# EAGLE board LEDDriver_v_4 (EAGLE 6.4)
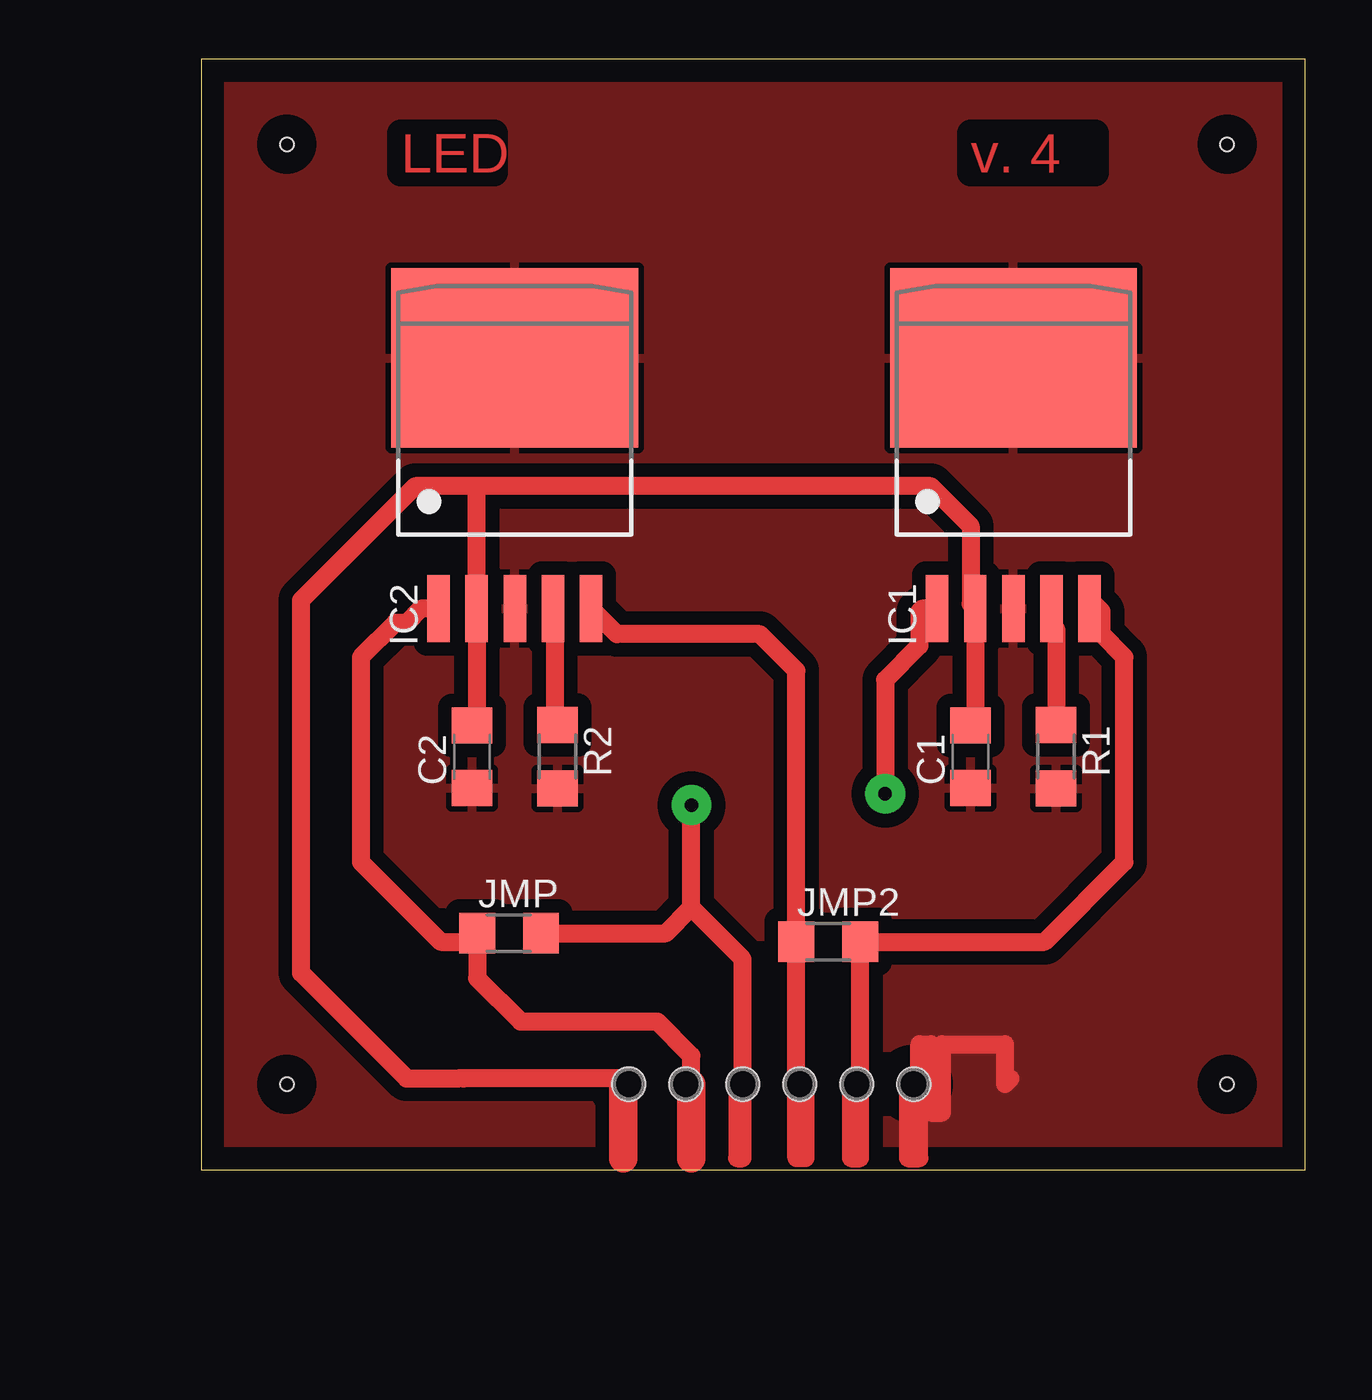
[diagram p0: board, top side]
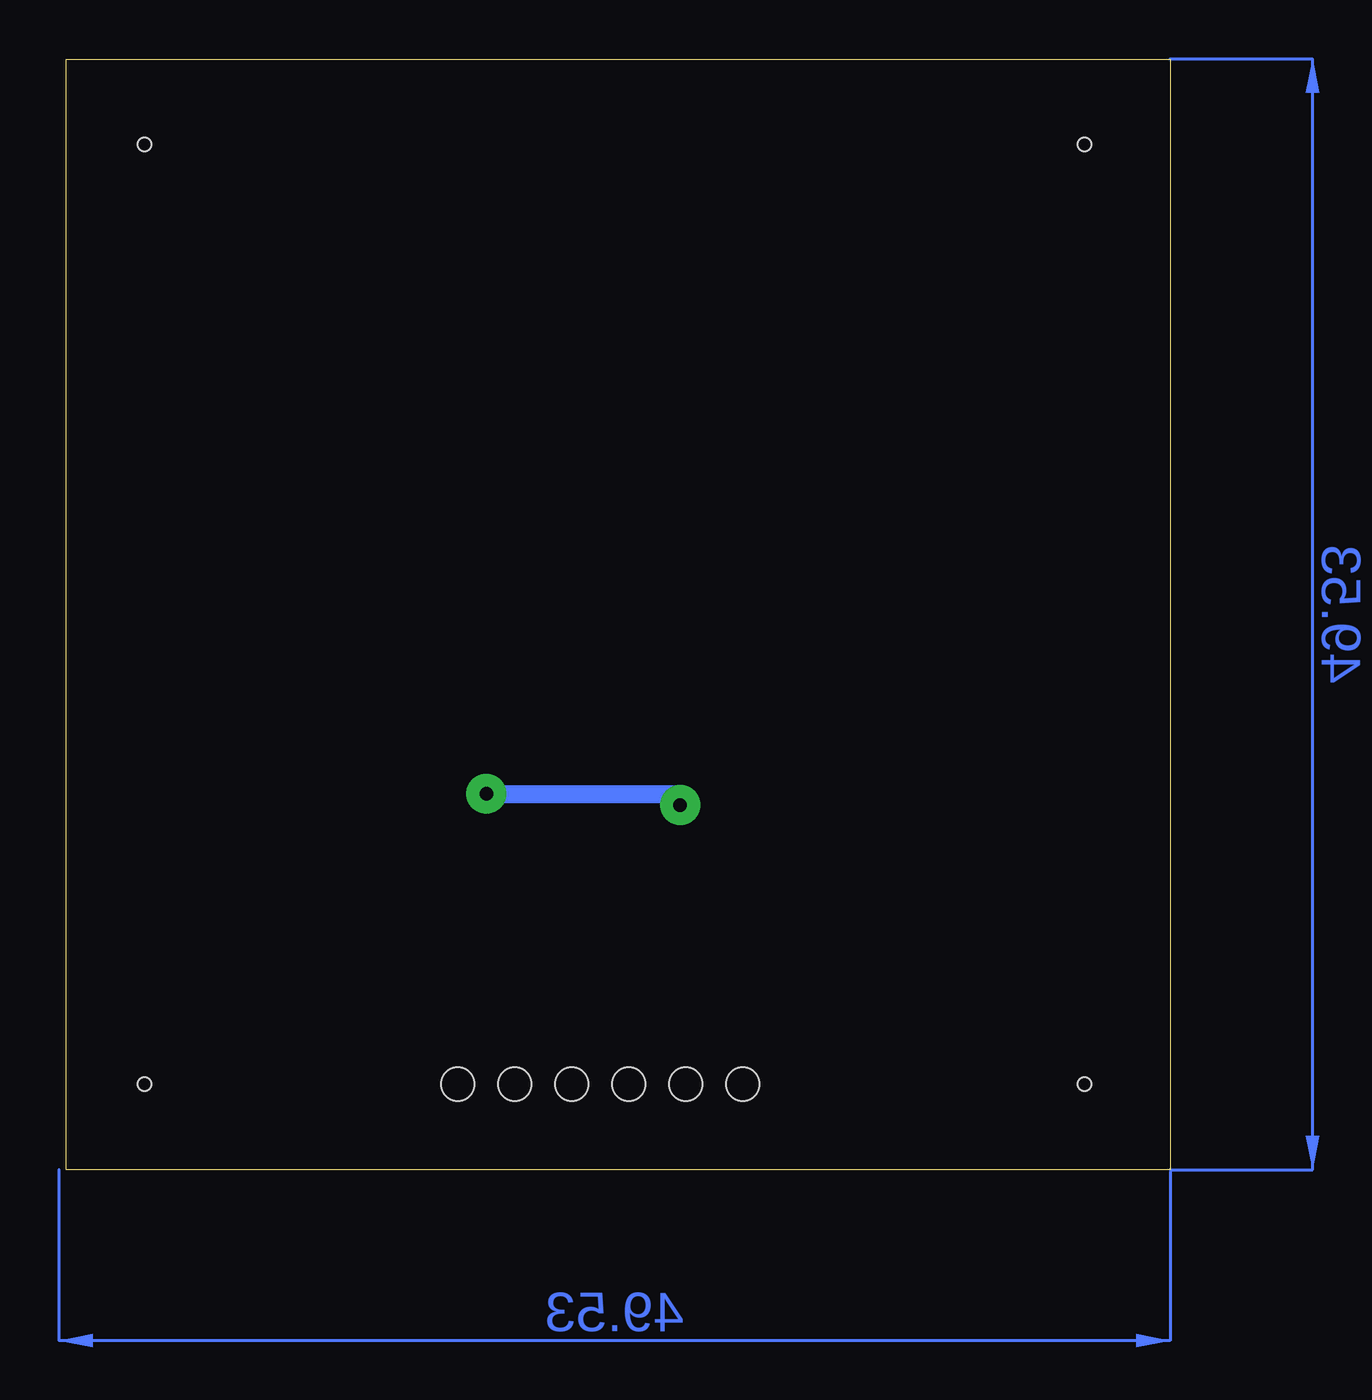
[diagram p1: board, bottom side, seen from below]

Size 49.2 x 49.52 mm. Coordinates in mm from the lower left corner, seen from the top.
Outline: 0,0 49.2,0 49.2,49.52 0,49.52 0,0
Copper layers (1*16): Top 0.035mm / dielectric 1.5mm / Bottom 0.035mm
Design rules "default *": minimum track width 10mil, minimum drill 24mil, track to track 15mil, track to pad 15mil, pad to pad 15mil, via to via 15mil, smd to smd 15mil, copper to edge 40mil, drill to drill 10mil, minimum pad ring 10mil, minimum via ring 8mil, stop-mask expansion 4mil, vias tented up to drill 0mil, thermal gap 10mil
Holes 0.6 mm at 45.72,3.81 45.72,45.72 3.81,45.72 3.81,3.81

## Footprints (pad centres in the part's own frame; a part is rotated, then mirrored left to right if it is on the bottom)
C1206 = smd 1.6 x 1.8: 1 -1.4,0; 2 1.4,0
TO263_5 = smd 1 x 3: 1 -3.4,-8; 2 -1.7,-8; 3 0,-8; 4 1.7,-8; 5 3.4,-8 | smd 11 x 8: TAB 0,3.175
R1206 = smd 1.6 x 1.803: 1 -1.422,0; 2 1.422,0
1X06_HOLES_ONLY = drill 0.889 pad 0.813: 1 0,0; 2 2.54,0; 3 5.08,0; 4 7.62,0; 5 10.16,0; 6 12.7,0 | hole 1.473: 0,0; 2.54,0; 5.08,0; 7.62,0; 10.16,0; 12.7,0

## Placement (x,y rotation side)
C1  [C1206]  34.29,18.41 90 top
C2  [C1206]  12.06,18.41 90 top
IC1  CAT4101  [TO263_5]  36.2,33.02 0 top
IC2  CAT4101  [TO263_5]  13.97,33.02 0 top
JMP  CH  [R1206]  13.72,10.54 0 top
JMP2  AMP  [R1206]  27.94,10.16 0 top
JP1  [1X06_HOLES_ONLY]  31.75,3.81 180 top
R1  [R1206]  38.1,18.41 270 top
R2  [R1206]  15.88,18.41 270 top

## Library data of the parts
C1 C2 JMP JMP2 R1 R2 = adafruit
IC1 IC2 = on-semiconductor; MPN: CAT4101TV-T75; OC_FARNELL: 1718452; OC_NEWARK: 08R5264
JP1 = SparkFun-Connectors

## Nets
+5V: C1.2 C2.2 IC1.2 IC2.2 JP1.6
GND: C1.1 C2.1 IC1.3 IC1.TAB IC2.3 IC2.TAB JP1.1 R1.2 R2.2
N$1: IC1.1 JMP.2 JP1.4
N$2: IC2.1 JMP.1 JP1.5
N$3: IC1.4 R1.1
N$4: IC2.5 JMP2.1 JP1.3
N$5: IC1.5 JMP2.2 JP1.2
N$8: IC2.4 R2.1

## Tracks (layer width: path | path; a pad name or v marks a point on that pad's centre or on a via)
+5V
  Top 0.813: C1.2 34.49,20.02 IC1.2 34.29,25.23 34.29,28.7 32.51,30.48 12.19,30.48 | C2.2 12.27,20.02 IC2.2 12.27,30.4 12.19,30.48 | 12.19,30.48 9.53,30.48 4.45,25.4 4.45,8.76 9.14,4.06 11.43,4.06 11.68,4.06 18.8,4.06 18.8,3.81 JP1.6
  Top 1.27: 18.8,3.81 18.8,0.51
GND
  Top 0.813: 36.07,4.06 35.81,3.81 35.81,5.59 33.02,5.59 33.02,2.54 32.51,2.54 32.51,5.59 32,5.59 32,0.51 31.5,0.51 31.5,3.81 JP1.1
  pour Top (isolate 0.61): 0,49.53 49.53,49.53 49.53,0 0,0
N$1  (via drill 0.6 pad 1.78)
  Top 0.813: 21.84,11.68 24.13,9.4 24.13,0.51 23.88,0.51 23.88,3.81 JP1.4 | 21.84,11.68 v21.84,16.26 21.84,16.76 | IC1.1 32.13,25.02 32,24.89 32,23.37 30.48,21.84 v30.48,16.76 | JMP.2 20.7,10.54 21.84,11.68
  Bottom 0.813: v30.48,16.76 21.84,16.76 v21.84,16.26
N$2
  Top 0.813: IC2.1 9.78,25.02 9.14,24.38 8.64,24.38 7.11,22.86 7.11,13.72 10.67,10.16 11.91,10.16 JMP.1 12.29,8.53 14.22,6.6 20.32,6.6 21.84,5.08 21.84,3.81 JP1.5
  Top 1.27: 21.84,3.81 21.84,0.51
N$3
  Top 0.254: 38.1,24.13 IC1.4
  Top 0.813: 38.1,24.13 R1.1
N$4
  Top 0.813: 26.67,10.01 JMP2.1 | JMP2.1 26.52,22.25 24.89,23.88 18.51,23.88 IC2.5 | JP1.3 26.92,3.81 26.92,0.51 26.52,0.51 JMP2.1
N$5
  Top 0.813: IC1.5 39.62,25.05 39.62,25.4 40.13,24.89 40.13,23.88 41.15,22.86 41.15,13.72 37.59,10.16 JMP2.2 29.36,0.51 28.96,0.51 28.96,3.81 JP1.2
N$8
  Top 0.813: IC2.4 15.75,24.94 15.75,19.96 R2.1
(copper drawn outside any net)
  shapes: Bottom area x2

## Text on the board
Top: LED | v. 4